# EAGLE board Rev 1.0 (EAGLE 7.6.0)
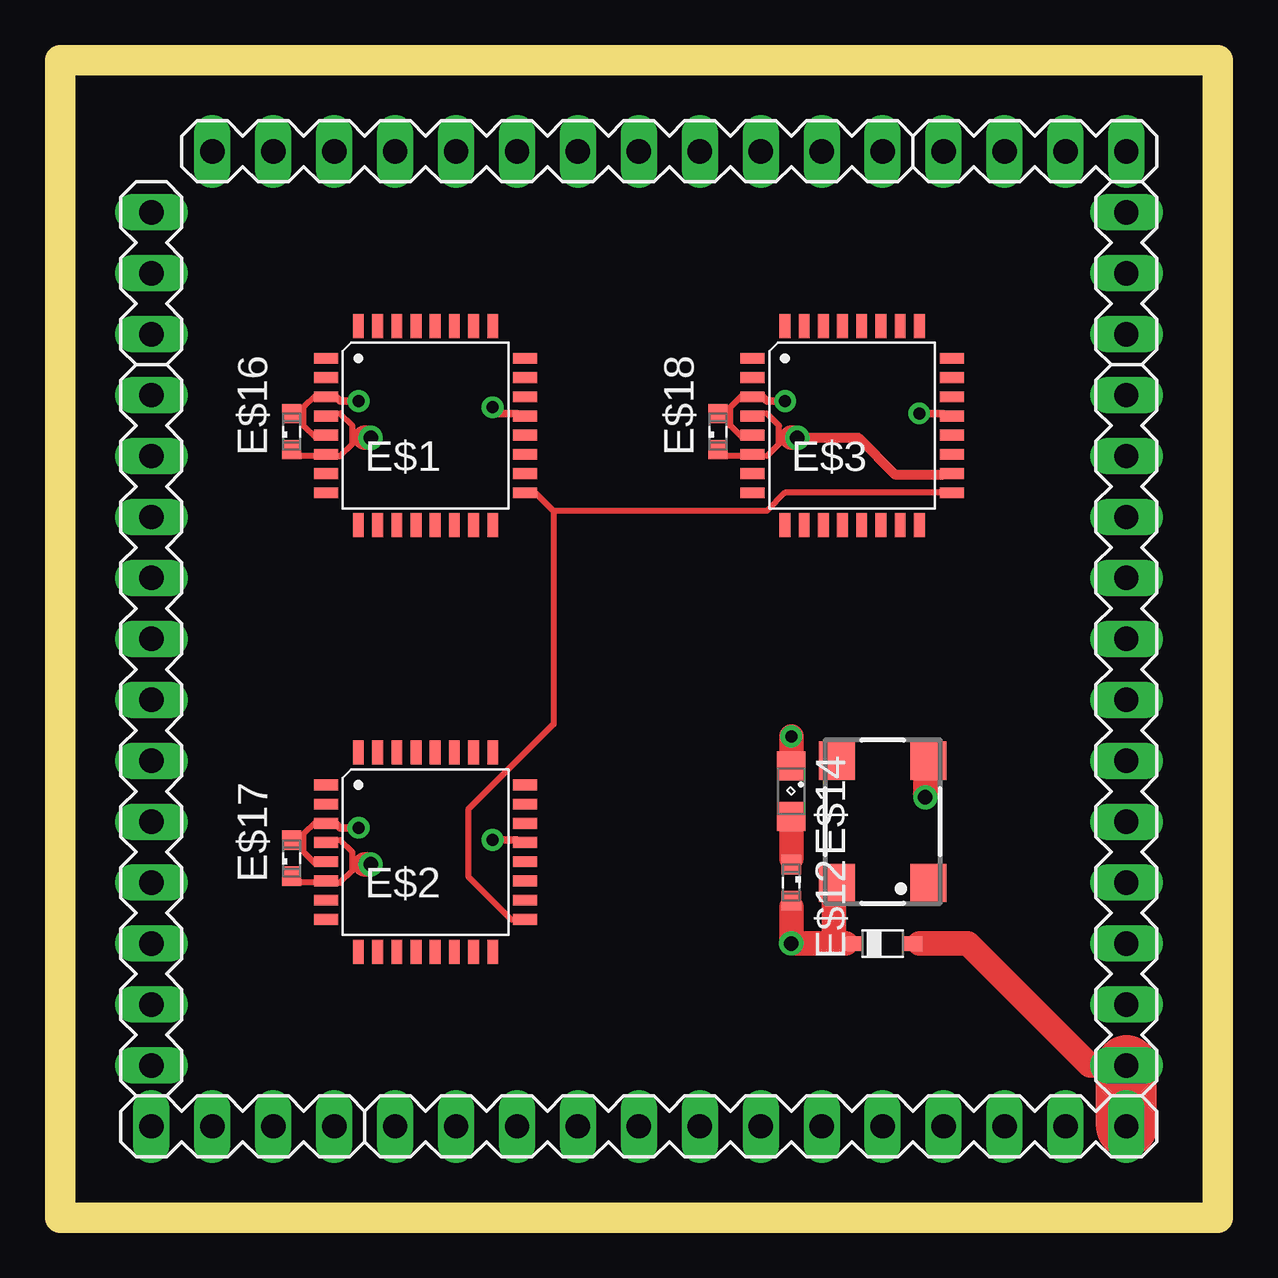
[diagram p0: board, top side]
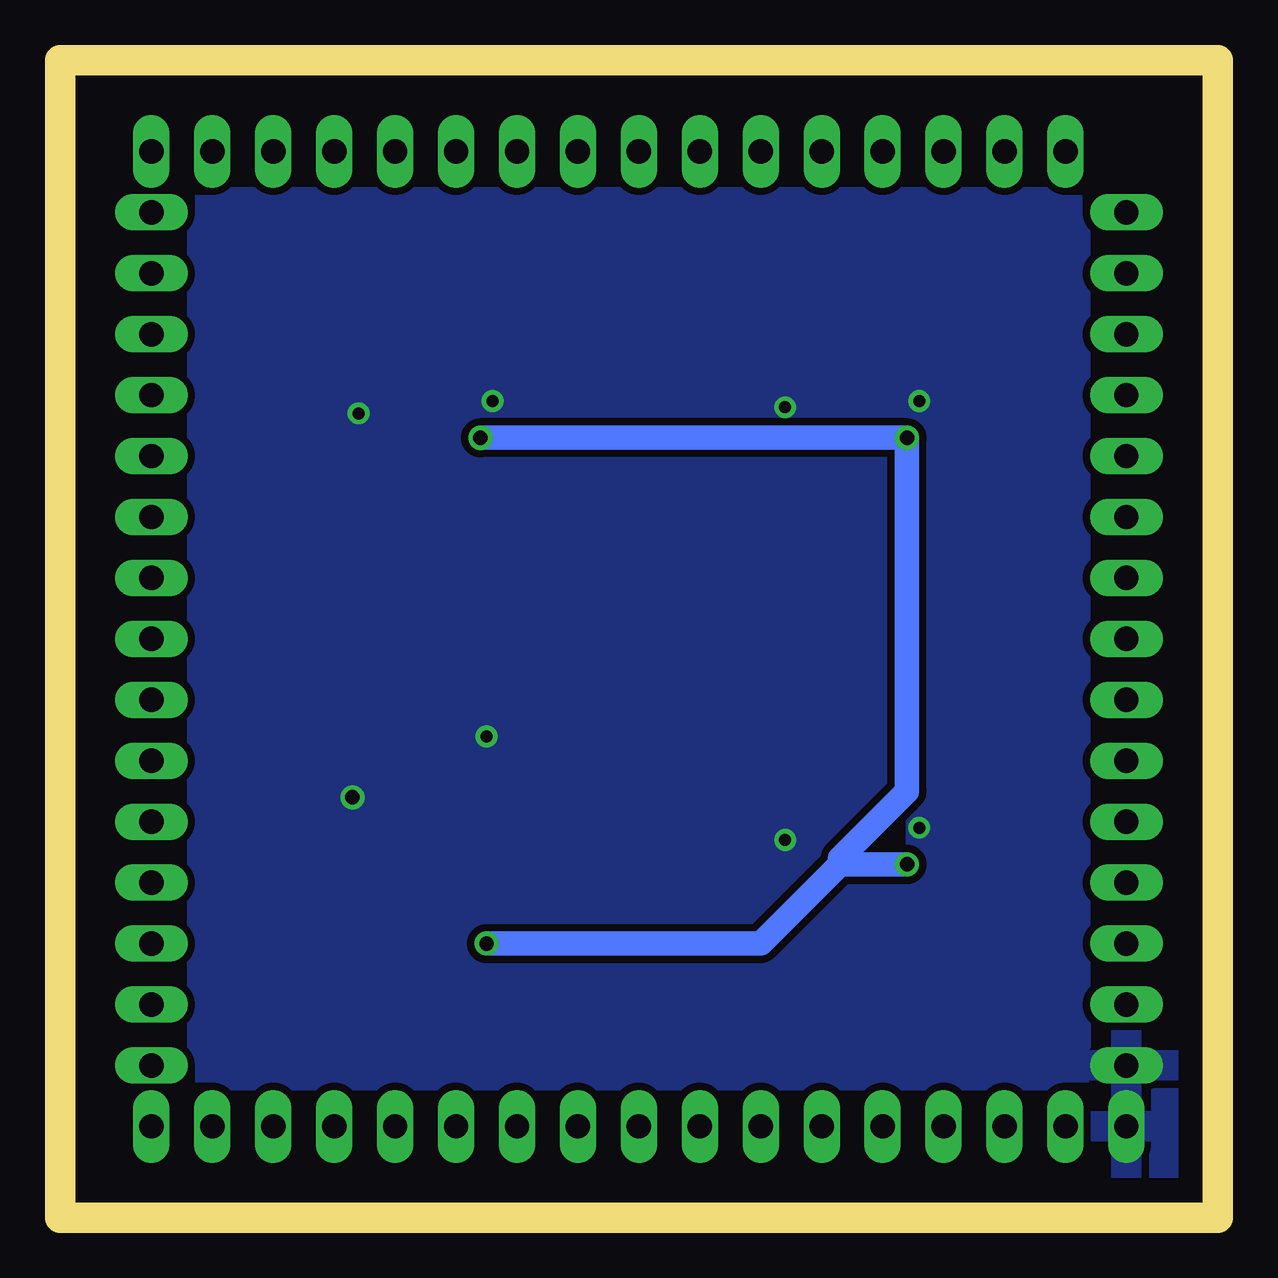
[diagram p1: board, bottom side, seen from below]

Size 48.26 x 48.26 mm. Coordinates in mm from the lower left corner, seen from the top.
Outline: 0,0 48.26,0 48.26,48.26 0,48.26 0,0
Copper layers (1*16): Top 0.035mm / dielectric 1.5mm / Bottom 0.035mm
Design rules "default": minimum track width 10mil, minimum drill 24mil, track to track 8mil, track to pad 8mil, pad to pad 8mil, via to via 8mil, smd to smd 8mil, copper to edge 40mil, drill to drill 8mil, minimum pad ring 10mil, minimum via ring 8mil, stop-mask expansion 4mil, vias tented up to drill 0mil, thermal gap 10mil

## Footprints (pad centres in the part's own frame; a part is rotated, then mirrored left to right if it is on the bottom)
VQFP32 = smd 1 x 0.45: 1 -4.15,2.8; 2 -4.15,2; 3 -4.15,1.2; 4 -4.15,0.4; 5 -4.15,-0.4; 6 -4.15,-1.2; 7 -4.15,-2; 8 -4.15,-2.8; 17 4.15,-2.8; 18 4.15,-2; 19 4.15,-1.2; 20 4.15,-0.4; 21 4.15,0.4; 22 4.15,1.2; 23 4.15,2; 24 4.15,2.8 | smd 0.45 x 1: 9 -2.8,-4.15; 10 -2,-4.15; 11 -1.2,-4.15; 12 -0.4,-4.15; 13 0.4,-4.15; 14 1.2,-4.15; 15 2,-4.15; 16 2.8,-4.15; 25 2.8,4.15; 26 2,4.15; 27 1.2,4.15; 28 0.4,4.15; 29 -0.4,4.15; 30 -1.2,4.15; 31 -2,4.15; 32 -2.8,4.15
MA13-1 = drill 1.016 long: 1 -15.24,0; 2 -12.7,0; 3 -10.16,0; 4 -7.62,0; 5 -5.08,0; 6 -2.54,0; 7 0,0; 8 2.54,0; 9 5.08,0; 10 7.62,0; 11 10.16,0; 12 12.7,0; 13 15.24,0
MA04-1 = drill 1.016 long: 1 -3.81,0; 2 -1.27,0; 3 1.27,0; 4 3.81,0
MA12-1 = drill 1.016 long: 1 -13.97,0; 2 -11.43,0; 3 -8.89,0; 4 -6.35,0; 5 -3.81,0; 6 -1.27,0; 7 1.27,0; 8 3.81,0; 9 6.35,0; 10 8.89,0; 11 11.43,0; 12 13.97,0
MA03-1 = drill 1.016 long: 2 0,0; 3 2.54,0; GND -2.54,0
LED_SML0603 = smd 0.8 x 0.8: A 0.75,0; C -0.75,0
SM77H = smd 1.6 x 1.5: 1 -2.55,-1.9; 2 2.55,-1.9; 3 2.55,1.9; 4 -2.55,1.9
SML0805 = smd 1.2 x 1.2: A 1.05,0; C -1.05,0
SOD323_ST = smd 0.8 x 0.6: A 1.25,0; C -1.25,0

## Placement (x,y rotation side)
E$1  [VQFP32]  15.24,33.02 0 top
E$2  [VQFP32]  15.24,15.24 0 top
E$3  [VQFP32]  33.02,33.02 0 top
E$4  [MA13-1]  29.21,3.81 0 top
E$5  [MA04-1]  40.64,44.45 0 top
E$6  [MA12-1]  44.45,20.32 90 top
E$7  [MA12-1]  3.81,20.32 90 top
E$8  [MA04-1]  7.62,3.81 0 top
E$9  [MA12-1]  20.32,44.45 180 top
E$10  [MA03-1]  3.81,39.37 90 top
E$11  [MA03-1]  44.45,39.37 270 top
E$12  [LED_SML0603]  30.48,13.97 270 top
E$13  [SM77H]  34.29,16.51 90 top
E$14  [SML0805]  30.48,17.78 270 top
E$16  [LED_SML0603]  9.65,32.77 90 top
E$17  [LED_SML0603]  9.65,14.99 90 top
E$18  [LED_SML0603]  27.43,32.77 90 top
E$19  [SOD323_ST]  34.29,11.43 0 top

## Library data of the parts
E$1-E$3 = atmel
E$4-E$11 = con-lstb
E$12 E$16-E$18 = eagle-ltspice
E$13 = crystal
E$14 = led
E$19 = diode

## Nets
GND: E$7.1 E$8.1
S$1: E$4.13 E$6.1

## Tracks (layer width: path | path; a pad name or v marks a point on that pad's centre or on a via)
GND  (via drill 0.5, 0.6)
  Top 0.305: v12.45,16.26 11.68,16.26 11.43,16.51 | v12.45,34.04 11.68,34.04 11.43,34.29 | v30.23,34.04 29.46,34.04 29.21,34.29 | v18.03,15.75 19.05,15.75 | v18.03,33.78 18.29,33.53 19.05,33.53 | v35.81,33.53 36.83,33.53
  Top 1.016: 30.48,19.05 v30.48,20.07 | v36.07,17.53 36.07,19.05
  pour Bottom (isolate 0.305): -2.54,-2.54 50.8,-2.54 50.8,50.8 -2.54,50.8
S$1
  Top 1.016: E$6.1 42.93,6.35 37.85,11.43 35.81,11.43
  Top 2.54: E$4.13 E$6.1
S$2
  Top 0.254: 11.43,13.97 11.68,13.97 12.19,14.48 12.19,15.24 11.68,15.75
S$3
  Top 0.254: 10.67,14.73 10.16,15.24 10.16,16 10.67,16.51
S$4
  Top 0.254: 11.43,31.75 11.68,31.75 12.19,32.26 12.19,33.02 11.68,33.53
S$5
  Top 0.254: 10.67,32.51 10.16,33.02 10.16,33.78 10.67,34.29
S$6
  Top 0.254: 29.46,31.75 29.97,32.26 29.97,33.02 29.46,33.53
S$7
  Top 0.254: 28.45,32.51 27.94,33.02 27.94,33.78 28.45,34.29
S$8
  Top 0.254: 10.67,31.75 9.91,31.75
S$9
  Top 0.254: 28.45,31.75 27.69,31.75
S$10
  Top 0.254: 10.67,13.97 9.91,13.97
S$11  (via drill 0.6)
  Top 0.406: v30.73,32.51 33.27,32.51 34.8,30.99 36.83,30.99
  Top 1.016: 32.77,11.43 32.26,11.43 | 32.26,11.43 v30.48,11.43 30.48,12.95 | 32.26,11.43 32.26,13.72 | v12.95,14.73 12.7,14.73 | v30.73,32.51 30.48,32.51 | v12.95,32.51 12.7,32.51
  Bottom 1.016: v30.48,11.43 19.05,11.43 15.75,14.73 | 15.75,14.73 v12.95,14.73 | 15.75,14.73 15.75,14.99 12.95,17.78 v12.95,32.51 v30.73,32.51
S$12
  Top 1.016: 30.48,14.99 30.48,16.26
S$13
  Top 0.254: 36.83,30.23 30.23,30.23 29.46,29.46 20.57,29.46 | 19.81,30.23 20.57,29.46 | 20.57,29.46 20.57,20.57 17.02,17.02 17.02,14.22 18.8,12.45 19.05,12.45